# Altium PCB FMCWRadar.PcbDoc (part 4 of 5)
Units mil, origin at the board's own origin, x right, y up, seen from the top; angles counter-clockwise.
Board outline 4763.78 x 3464.57 mil, 6 copper layers (L1, L2(GND), L3, L4, L5(GND), L6), stack 32.112 mil thick; 306 components, 195 nets, 1057 pads, 1126 vias.
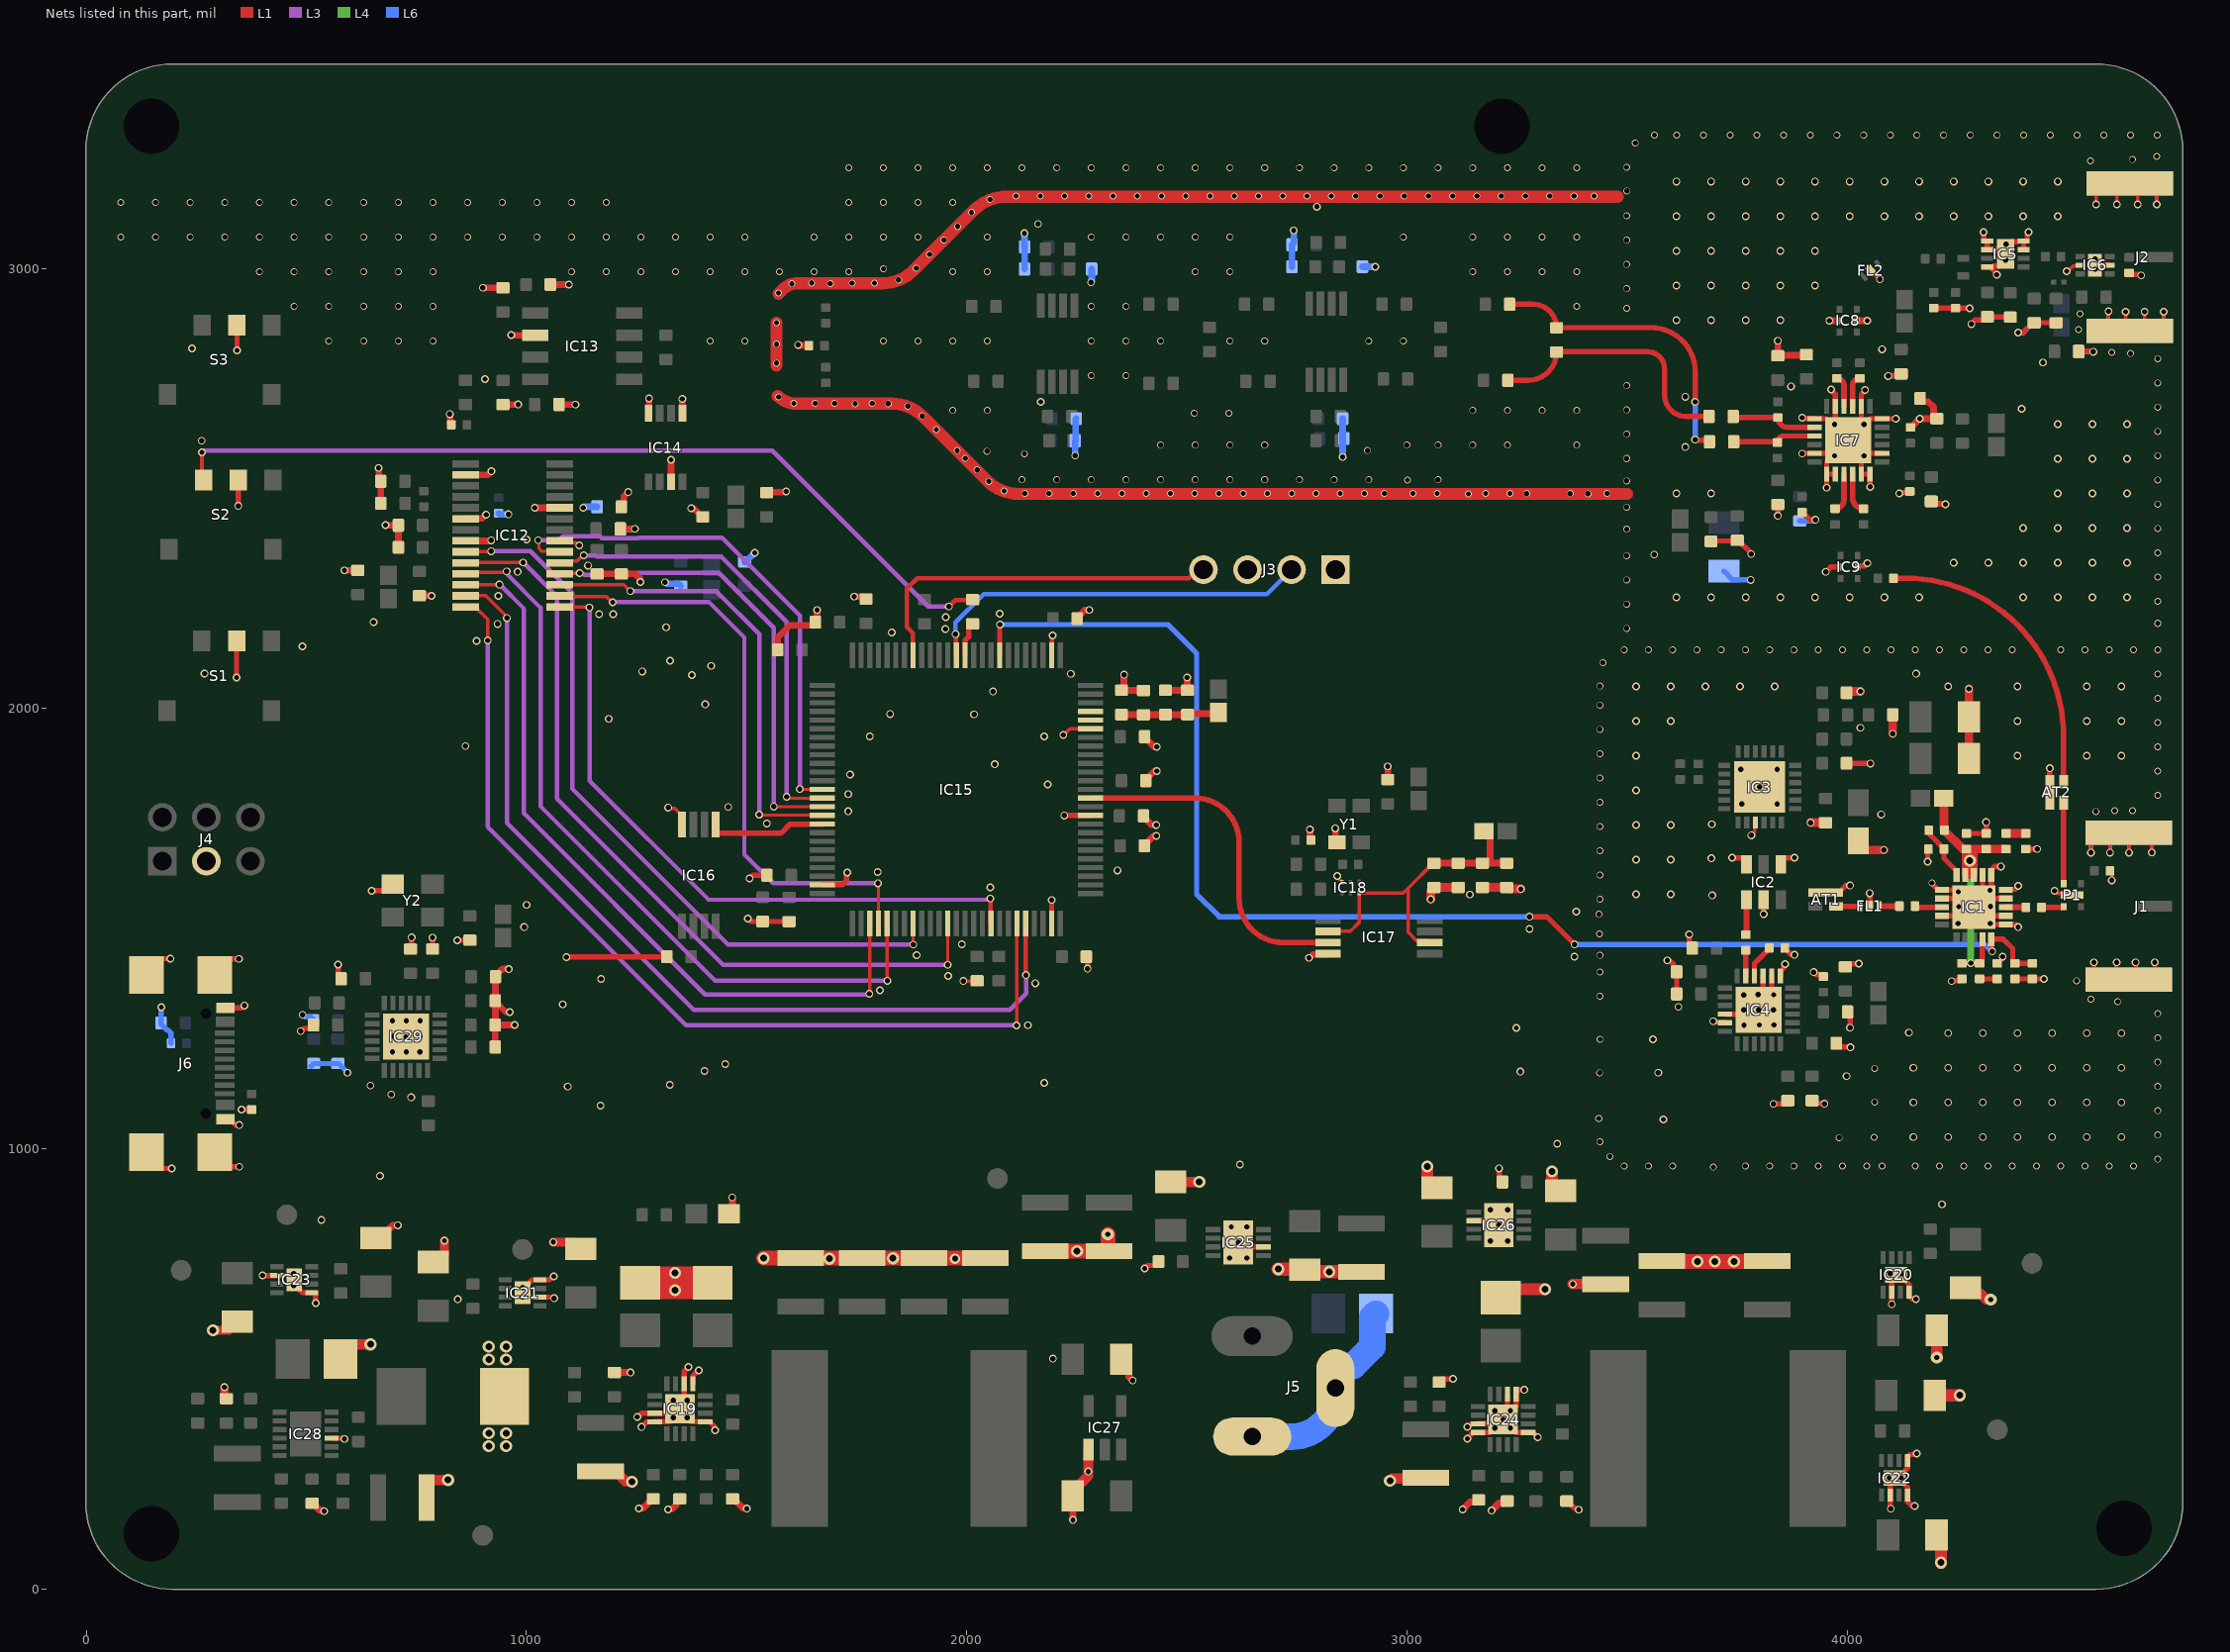
[diagram p7: the nets of this part, all layers, seen from the top]

## Via types
v1: diameter 17.72, hole 11.81, L1 to L6, tented both sides, 692 vias
v2: diameter 15.75, hole 11.81, L1 to L6, tented both sides, 386 vias
v3: diameter 27.56, hole 15.75, L1 to L6, tented both sides, 44 vias
v4: diameter 27.56, hole 11.81, L1 to L6, tented both sides, 3 vias
v5: diameter 23.62, hole 13.78, L1 to L6, tented both sides, 1 vias

## Nets (pads, with @x,y where several pads share a name; then routed paths per layer and width w, separated by ;. In a path a pad name is that pad's centre, name@x,y a point inside that pad or via, vN(x,y) a via of type N, cw(c..) or ccw(c..) an arc to the next point about the centre after c; other vN are vias at no path point) (continued)
BOOT1: R40.2 S2.C1 | length 1970.3
  L1 w10: v1(262.82,2582.15) 262.82,2523.1 S2.C1@266.75,2519.16 ; v1(1959.67,2231.76) 1960.13,2231.76 1974.8,2246.43 2012.82,2246.43 R40.2@2013.76,2247.37
  L3 w10: v1(262.82,2582.15) 266.62,2585.95 1558.23,2585.95 1912.42,2231.76 v1(1959.67,2231.76)
BOOT1_MCU: IC15.37 R40.1 | length 79.8
  L1 w12: IC15.37@1996.44,2120.73 1996.44,2154.92 2004.8,2163.28 2004.8,2185.25 2011.8,2192.25 R40.1@2013.76,2192.25
CLK_VDD: C114.1 C115.1 C116.2 C117.2 FB11.2 IC17.2 IC17.6 IC18.6 | length 750.3
  L1 w8: IC17.2@2821.09,1493.88 2871.45,1493.88 2891.44,1513.87 IC18.6@2891.44,1581.09 2992.24,1581.09 3003.04,1591.89 ; IC17.6@3052.42,1468.29 3047.57,1473.15 3021.59,1473.15 3003.04,1491.7 3003.04,1591.89 ; C117.2@3061.75,1648.65 3059.79,1648.65 3003.04,1591.89
  L1 w16: C117.2@3061.75,1648.65 C116.2@3116.75,1648.65 C115.1@3171.76,1648.65 3189.04,1648.65 ; FB11.2@3175.14,1721.09 3178.05,1721.09 3188.91,1710.22 3188.91,1648.77 3189.04,1648.65 ; C114.1@3224.79,1648.65 C114.1@3226.76,1648.65 3189.04,1648.65
DCMI-D0: IC12.20 IC15.63 | length 1188.4
  L1 w7: v1(1026.82,2382.38) 1028.8,2380.4 1028.8,2363.02 1035.02,2356.8 1074.63,2356.8 IC12.20@1075.3,2356.13 ; v1@1621.45,1816.49 IC15.63@1671.7,1816.49
  L1 w10: v1(1621.04,1816.9) v1@1621.45,1816.49 ; IC15.63@1671.7,1816.49 IC15.63@1672.11,1816.09
  L3 w10: v1(1026.82,2382.38) 1074.44,2382.38 1083.23,2391.17 1167.11,2391.17 1170.94,2387.34 1254.83,2387.34 1255.57,2388.08 1444.43,2388.08 1621.04,2211.47 v1(1621.04,1816.9)
DCMI-D1: IC12.19 IC15.64 | length 1065.2
  L1 w7: v1@1596.13,1796.15 IC15.64@1671.86,1796.15
  L1 w8: IC12.19@1075.56,2330.83 1080.12,2335.39 1115.02,2335.39 1127.6,2347.97 v1(1130.23,2347.97)
  L1 w10: v1(1591.04,1799.16) 1593.13,1799.16 v1@1596.13,1796.15 ; IC15.64@1671.86,1796.15 IC15.64@1672.11,1796.4
  L3 w10: v1(1130.23,2347.97) 1156.64,2347.97 1159.09,2345.52 1240.6,2345.52 1240.75,2345.36 1442.38,2345.36 1591.04,2196.7 v1(1591.04,1799.16)
DCMI-D2: IC12.18 IC15.65 | length 1058.6
  L1 w7: v1@1562.35,1777.03 IC15.65@1671.8,1777.03
  L1 w8: IC12.18@1075.3,2306.13 1075.97,2306.8 1120.37,2306.8 v1(1121.04,2307.47)
  L1 w10: v1(1562.04,1777.34) v1@1562.35,1777.03 ; IC15.65@1671.8,1777.03 IC15.65@1672.11,1776.72
  L3 w10: v1(1121.04,2307.47) 1122.51,2306 1129.58,2306 1131.55,2304.02 1246.24,2304.02 1250.44,2308.22 1437.29,2308.22 1562.04,2183.47 v1(1562.04,1777.34)
DCMI-D3: IC12.17 IC15.66 | length 1055.5
  L1 w7: v1@1533.5,1756.59 1533.5,1757.64 1533.95,1758.09 1671.05,1758.09 IC15.66@1672.11,1757.03
  L1 w8: IC12.17@1075.56,2280.83 1220.89,2280.83 1235.25,2266.47 v1(1236.04,2266.47)
  L1 w10: v1(1529,1759) 1531.09,1759 v1@1533.5,1756.59
  L3 w10: v1(1236.04,2266.47) 1239.35,2266.47 1239.6,2266.72 1304.81,2266.72 1305.4,2266.13 1431.38,2266.13 1529,2168.51 v1(1529,1759)
DCMI-D4: IC12.16 IC15.79 | length 1374.5
  L1 w7: IC15.79@1799.59,1511.44 v1@1799.59,1601.79
  L1 w8: IC12.16@1075.3,2256.13 1077.63,2253.79 1181.88,2253.79 1194.19,2241.47 v1(1196.04,2241.47)
  L1 w10: v1(1798.41,1602.97) v1@1799.59,1601.79
  L3 w10: v1(1196.04,2241.47) 1415.04,2241.47 1495.04,2161.47 1495.04,1668.47 1560.54,1602.97 v1(1798.41,1602.97)
DCMI-D5: IC12.15 IC15.92 | length 1543.3
  L1 w8: IC12.15@1075.3,2231.09 1076.11,2230.28 1142.23,2230.28 v1(1143.04,2229.47)
  L1 w10: v1(2054.04,1568.47) 2054.04,1544.61 2054.59,1544.06 2054.59,1512.35 IC15.92@2055.5,1511.44
  L3 w10: v1@1143.25,2229.26 1143.25,1836.12 1413.84,1565.53 2045.64,1565.53 2047.11,1567 2052.56,1567 v1(2054.04,1568.47)
DCMI-D6: IC12.14 IC15.95 | length 2153.1
  L1 w7: v1(2113.1,1280.2) 2113.83,1280.93 2113.83,1510.72 IC15.95@2114.55,1511.44
  L1 w8: IC12.14@861.76,2231.09 883.23,2231.09 912.04,2202.28 v1(912.04,2154.47)
  L3 w10: v1(912.04,2154.47) 912.04,1730.99 1362.49,1280.54 2112.76,1280.54 v1(2113.1,1280.2)
DCMI-D7: IC12.13 IC15.96 | length 2114.5
  L1 w7: IC15.96@2135.14,1483.41 2136.84,1481.71
  L1 w8: IC12.13@861.76,2256.13 907.82,2256.13 955.77,2208.18 v1(955.77,2205.58)
  L1 w10: IC15.96@2134.24,1511.44 2135.14,1510.54 IC15.96@2135.14,1483.41 ; IC15.96@2134.49,1483.41 2134.49,1394.57 v1(2134.7,1394.36)
  L3 w10: v1(955.77,2205.58) 955.77,1739.96 1380.34,1315.4 2097.97,1315.4 2134.97,1352.4 2134.97,1394.09 v1(2134.7,1394.36)
DCMI-D8: IC12.12 IC15.78 | length 1735.9
  L1 w7: v1(1778.98,1351.72) 1779.9,1352.64 IC15.78@1779.9,1511.44
  L1 w8: IC12.12@861.76,2281.09 861.86,2281.19 938.76,2281.19 v1(938.87,2281.3)
  L3 w10: v1(938.87,2281.3) 939.92,2281.3 994.57,2226.65 994.57,1761.69 1405.79,1350.47 1777.74,1350.47 v1(1778.98,1351.72)
DCMI-D9: IC12.11 IC15.80 | length 1742.9
  L1 w7: v1@1819.48,1381.76 IC15.80@1819.48,1511.24
  L1 w8: IC12.11@861.76,2306.13 865.24,2309.61 953.18,2309.61 v1(955.04,2311.47)
  L1 w10: IC15.80@1819.27,1511.44 IC15.80@1819.48,1511.24 ; v1@1819.48,1381.76 v1(1819.68,1381.55)
  L3 w10: v1(955.04,2311.47) 956.51,2310 956.51,2304.5 1032.04,2228.97 1032.04,1777.96 1428.52,1381.47 1819.6,1381.47 v1(1819.68,1381.55)
DCMI-D10: IC12.10 IC15.87 | length 1837.7
  L1 w7: v1@1957.05,1417.63 IC15.87@1957.05,1511.42
  L1 w8: IC12.10@861.76,2331.09 861.96,2331.29 992.02,2331.29 v1(992.48,2331.76)
  L3 w10: v1(992.48,2331.76) 992.75,2331.76 1069.04,2255.47 1069.04,1795.27 1446.84,1417.47 1956.89,1417.47 v1(1957.03,1417.61)
DCMI-D11: IC12.9 IC15.83 | length 1696.1
  L1 w7: IC15.83@1878.56,1511.22 1878.59,1511.18 1878.59,1464.13 v1(1878.86,1463.86)
  L1 w8: IC12.9@861.76,2356.13 862.43,2356.8 919.37,2356.8 v1(920.04,2357.47)
  L1 w10: IC15.83@1878.33,1511.44 IC15.83@1878.56,1511.22
  L3 w10: v1(920.04,2357.47) 1009.04,2357.47 1104.29,2262.22 1104.29,1817.55 1457.8,1464.04 1878.68,1464.04 v1(1878.86,1463.86)
FILT_IF_N: C55.1 R21.2 R22.2 | length 697.9
  L1 w12: R22.2@3233.6,2918.47 3286.6,2918.47 cw(c3286.6,2865.03) R21.2@3340.04,2865.03 3555.12,2865.03 cw(c3555.12,2765.03) 3655.12,2765.03 v1(3655.12,2696.39) ; v1(3655.12,2610.71) 3656.21,2609.61 3684.11,2609.61 C55.1@3687.64,2606.09
  L6 w12: v1(3655.12,2610.71) v1(3655.12,2696.39)
FILT_IF_P: C56.1 R17.2 R21.1 | length 610.7
  L1 w12: R17.2@3229.6,2745.47 3275.6,2745.47 ccw(c3275.6,2809.91) R21.1@3340.04,2809.91 3340.04,2810.5 3546.28,2810.5 cw(c3546.28,2771.13) 3585.65,2771.13 3585.65,2712.07 ccw(c3634.25,2712.07) 3634.25,2663.47 C56.1@3686.48,2663.47 C56.1@3679.48,2661.81
GND: AT1.G AT2.G C1.2 C2.1 C3.1 C5.2 C6.1 C7.1 C11.2 C13.2 C14.1 C15.1 C16.2 C17.1 C18.1 C20.1 C21.1 C22.1 C23.1 C24.1 C25.1 C26.1 C27.2 C28.1 C29.2 C30.1 C31.2 C32.1 C33.1 C34.2 C35.1 C36.1 C37.1 C40.1 C41.2 C42.1 C43.1 C44.1 C45.1 C46.1 C47.1 C48.1 C49.2 C50.2 C51.1 C52.1 C57.1 C58.1 C68.1 C69.1 C72.2 C73.2 C74.1 C75.1 C76.2 C77.2 C78.1 C79.1 C80.1 C81.1 C82.1 C83.1 C84.1 C85.1 C86.1 C87.1 C88.2 C89.1 C90.1 C91.1 C92.1 C93.1 C94.1 C95.1 C96.1 C97.1 C98.1 C99.1 C100.1 C101.1 C102.1 C103.1 C104.1 C105.1 C106.1 C107.1 C108.1 C109.1 C110.1 C111.1 C112.1 C113.1 C114.2 C115.2 C116.1 C117.1 C118.1 C119.1 C120.1 C121.2 C122.1 C123.1 C125.2 C126.2 C127.2 C129.1 C130.1 C131.1 C132.1 C134.1 C136.1 C137.1 C138.1 C139.2 C140.1 C142.1 C144.1 C145.1 C146.1 C147.2 C149.1 C150.1 C151.2 C152.1 C153.1 C154.1 C155.1 C156.1 C157.1 C158.1 C159.2 C160.1 C161.1 C162.1 C163.1 C164.1 C165.1 C166.1 C170.2 C171.1 C172.2 C173.1 C174.1 C175.1 C176.2 C177.1 C178.1 C179.1 C180.2 C181.1 FL1.2 FL2.2 IC1.1 IC1.2 IC1.4 IC1.11 IC1.12 IC1.14 IC1.15 IC1.16 IC1.17 IC1.21 IC2.1 IC2.3 IC2.5 IC3.15 IC3.25 IC4.1 IC4.2 IC4.3 IC4.10 IC4.11 IC4.25 IC5.3 IC5.4 IC5.5 IC5.6 IC5.8 IC5.9 IC6.2 IC6.5 IC6.7 IC7.1 IC7.2 IC7.5 IC7.6 IC7.8 IC7.12 IC7.14 IC7.17 IC7.19 IC7.23 IC7.25 IC8.2 IC8.5 IC9.2 IC9.5 IC12.2 IC12.6 IC12.8 IC12.21 IC12.24 IC13.6 IC14.1 IC14.4 IC14.7 IC15.10 IC15.20 IC15.27 IC15.74 IC15.99 IC16.4 IC17.4 IC18.3 IC19.3 IC19.4 IC19.9 IC19.13 IC19.14 IC19.17 IC20.2 IC20.4 IC20.9 IC21.2 IC21.4 IC21.9 IC22.2 IC22.4 IC22.5 IC22.9 IC23.2 IC23.5 IC23.9 IC24.3 IC24.4 IC24.9 IC24.13 IC24.14 IC24.17 IC25.6 IC25.9 IC26.6 IC26.9 IC27.1 IC28.9 IC29.25 J1.2 J1.3 J1.4 J1.5 J2.2 J2.3 J2.4 J2.5 J3.1 J3.3 J4.3 J5.2 J5.3 J6.A1 J6.B1 J6.S1 J6.S2 J6.S3 J6.S4 L5.2 LED1.1 P1.5 R2.1 R3.1 R4.1 R5.2 R8.2 R9.1 R29.1 R34.1 R36.1 R44.1 R45.1 R46.1 R49.1 R50.1 R51.1 R54.1 R56.1 R59.1 R60.1 R61.1 S1.B1 S2.B1 S3.B1 Y1.2 Y2.2 | length 21247.1
  L1 w8: IC12.21@1075.56,2380.83 1080.12,2376.26 1111.69,2376.26 1117.53,2370.42 v1(1120.16,2370.42) ; v1(1322.31,1775.06) 1324.17,1773.2 1337.1,1773.2 1353.37,1756.93 IC16.4@1353.37,1736.76 ; v1(1992.63,1380.79) 1992.92,1381.07 2023.76,1381.07 R36.1@2024.04,1381.35 ; v1(2219.51,1939.82) 2220.89,1939.82 2234.95,1953.88 IC15.20@2281.4,1953.88 ; v1(2841.91,1619.4) 2843.77,1617.54 2843.77,1614.85 2852.07,1606.55 IC18.3@2852.07,1604.71 ; IC4.10@3722.65,1305.69 IC4.10@3723.45,1306.49 ; v1(3782.5,1712.07) 3789.85,1719.42 3789.85,1739.18 IC3.15@3791.76,1741.09 IC3.15@3792.53,1740.31 ; v1(4471.48,1586.09) 4477.41,1580.16 4507.68,1580.16 P1.5@4511.76,1576.09 ; v1(4499.16,2993.16) 4501.78,2993.16 4513.8,3005.18 4527.85,3005.18 IC6.5@4529.76,3007.09 ; J1.3@4553.24,1738.24 4576.8,1714.68 4597.3,1714.68 J1.3@4600.66,1714.68 ; v1(4554.16,1672.7) J1.3@4554.16,1737.33 ; v1(4561.12,1423.26) 4561.12,1403.59 4584.68,1380.03 J1.2@4635.86,1380.03 ; v1(4565.97,3145.14) 4565.97,3166.62 J2.3@4589.53,3190.18 ; J2.3@4565.97,3213.74 J2.3@4589.53,3190.18 ; v1(4593.91,2902.15) 4593.91,2879.1 J2.2@4613.54,2859.47 ; J1.3@4596.55,1738.24 J1.3@4620.11,1714.68 ; R4.1@4597.19,1631.09 4601.4,1626.87 v1(4601.4,1609.71) ; J1.3@4597.3,1718.04 J1.3@4600.66,1714.68 ; v1(4597.46,1672.7) J1.3@4597.46,1737.33 ; J2.2@4597.46,2834.44 4621.02,2858 J2.2@4625.02,2858 ; J2.2@4598.53,2857.74 J2.2@4598.8,2858 ; J2.2@4598.8,2857.05 4641.32,2857.05 J2.2@4642.28,2858 ; v1(4612.3,1423.26) 4612.3,1403.59 J1.2@4635.86,1380.03 ; v1(4613.21,3145.14) 4613.21,3166.62 J2.3@4636.77,3190.18 ; J2.3@4617.15,3213.74 J2.3@4640.71,3190.18 ; J2.2@4625.02,2838.27 J2.2@4626.61,2838.27 ; v1(4632.9,2901.05) 4632.9,2879.1 J2.2@4652.52,2859.47 ; v1(4640.77,1672.7) 4640.77,1714 J1.3@4640.1,1714.68 ; J2.2@4642.29,2855.54 J2.2@4658.04,2855.54 ; J2.2@4642.29,2859.47 J2.2@4652.52,2859.47 ; J2.2@4649.44,2850.87 J2.2@4655.28,2856.71 ; J1.2@4655.61,1364.52 J1.2@4640.1,1380.03 ; v1@4655.61,1419.33 4655.61,1395.55 J1.2@4640.1,1380.03 ; v1(4660.46,3145.14) 4660.46,3170.43 J2.3@4640.71,3190.18 ; J2.3@4660.46,3208.35 J2.3@4642.29,3190.18 ; J2.2@4660.52,2855.54 4695.95,2855.54 4719.51,2879.1 v1(4719.51,2901.05) ; v1(4676.2,2901.05) 4676.2,2877.64 4658.04,2859.47 J2.2@4652.52,2859.47 ; J1.3@4691.92,1717.25 4670.05,1717.25 J1.3@4667.48,1714.68 ; v1(4692.42,1672.93) 4692.42,1715.87 4691.04,1717.25 4691.04,1738.24 J1.3@4667.48,1714.68 ; v1@4698.91,1419.33 4698.91,1403.59 4675.35,1380.03 J1.2@4640.1,1380.03 ; v1(4703.76,3145.14) 4703.76,3166.62 J2.3@4680.2,3190.18 ; J2.3@4703.76,3213.74 J2.3@4680.2,3190.18 ; J2.3@4589.53,3190.18 J2.3@4636.77,3190.18 ; J1.3@4600.66,1714.68 J1.3@4620.11,1714.68 ; J1.3@4620.11,1714.68 J1.3@4640.1,1714.68 ; J1.2@4635.86,1380.03 J1.2@4640.1,1380.03 ; J2.3@4636.77,3190.18 J2.3@4642.29,3190.18 ; J1.3@4640.1,1714.68 J1.3@4667.48,1714.68 ; J2.3@4640.71,3190.18 J2.3@4642.29,3190.18 ; J2.3@4642.29,3190.18 J2.3@4680.2,3190.18
  L1 w10: IC15.27@2193.61,2121.05 2194.2,2121.64 2194.2,2164.76 v1(2195.26,2165.82) ; v1(3695.95,1289.7) 3698.04,1289.7 3700.83,1286.91 3721.74,1286.91 IC4.11@3722.65,1286 ; IC4.10@3723.45,1306.49 IC4.10@3724.25,1305.69 ; IC4.25@3789.58,1305.69 v1(3799.42,1315.53)
  L1 w11.81: R50.1@3073.29,469.71 3080.39,476.8 3104.37,476.8 v1(3105.04,477.47) ; v1(3209.5,955.43) 3210.29,954.65 3210.29,931.5 C166.1@3217.38,924.41
  L1 w12: J6.S4@137.11,992.5 137.11,988.96 170.48,955.59 174.02,955.59 174.39,955.22 v1(194.26,955.22) ; J6.S3@137.11,1394.87 137.11,1398.29 170.48,1431.66 v1(191.28,1431.66) ; J6.S2@291.83,992.5 325.18,959.16 v1(347.8,959.16) ; J6.S1@291.83,1394.87 291.83,1397.83 325.2,1431.2 v1(346.86,1431.2) ; J6.B1@314.47,1067.7 325.29,1067.7 339.35,1053.64 v1(347.8,1053.64) ; J6.A1@314.47,1319.67 353.98,1319.67 v1(359.61,1325.3) ; v1(341.56,2070.34) S1.B1@341.56,2153.02 ; v1(342.62,2813.37) S3.B1@342.62,2870.89 ; v1(345.5,2460.1) S2.B1@345.5,2519.16 ; v1(352.85,1088.81) R61.1@375.47,1088.81 ; v1(400.48,712.02) 400.55,712.08 433.22,712.08 IC23.2@433.29,712.15 462.82,712.15 IC23.9@472.66,702.31 ; v1(471.48,688.45) 478.65,688.45 484.38,682.72 484.38,679.81 491.41,672.78 IC23.5@512.03,672.78 520.49,672.78 520.58,672.69 520.58,650.17 v1(521.68,649.08) ; v1@487.23,1267.29 488.88,1267.29 494.8,1273.21 509.76,1273.21 516.76,1280.21 C179.1@516.76,1281.09 ; R56.1@513.29,194.59 R56.1@515.25,194.59 ; v1@539.28,177.73 v1(540.38,176.64) ; IC28.9@557.35,342.31 557.44,342.21 583.58,342.21 584.99,340.81 v1(586.53,340.81) ; v1(572.2,1418.44) 572.2,1393.09 R59.1@579.2,1386.09 ; v1(648.64,1586.09) 681.2,1586.09 Y2.2@696.2,1601.09 ; C144.1@658.29,797.27 C144.1@668.13,797.27 ; C170.2@736.75,1453.65 739.2,1456.09 v1(739.2,1479.79) ; v1@786.44,1479.79 v1(786.76,1479.47) C171.1@786.76,1453.65 ; v1@841.56,1471.91 v1(843.17,1473.53) C181.1@871.75,1473.53 ; v1(1062.03,710.1) 1060.48,710.1 1052.61,702.23 IC21.4@1030.53,702.23 1030.44,702.13 1012.72,702.13 991.16,680.58 IC21.9@991.16,672.7 1001.01,662.86 IC21.2@1030.53,662.86 1058.83,662.86 1061.43,660.26 v1(1062.97,660.26) ; v1(1090.85,1435.09) 1091.35,1435.59 1318.69,1435.59 C119.1@1319.2,1436.09 ; v1(1251.81,390.79) 1253.36,390.79 1261.87,399.3 1291.58,399.3 IC19.3@1291.68,399.39 1338.92,399.39 ccw(c1338.92,409.24) IC19.17@1348.76,409.24 ; v1(1261.55,367.89) 1273.14,379.48 IC19.4@1290.64,379.48 ; IC19.4@1291.68,379.71 1319.24,379.71 ccw(c1319.24,409.24) IC19.17@1348.76,409.24 ; IC19.17@1349.73,409.24 1363.92,388.38 1368.42,381.77 ccw(c1379.26,409.24) 1379.26,379.71 IC19.9@1405.85,379.71 1416.49,379.71 1427.36,368.84 1427.36,361.35 v1(1428.45,360.26) ; v1(1368.13,504.39) 1358.61,494.87 IC19.14@1358.61,466.32 1358.61,419.08 cw(c1348.76,419.08) IC19.17@1348.76,409.24 ; IC19.13@1378.29,466.32 1378.29,484.14 v1@1390.73,496.58 ; v1(1502.98,1523.09) 1510.1,1515.97 C102.1@1596.76,1515.97 ; v1(1506.91,1613.65) 1514.35,1621.09 C118.1@1546.64,1621.09 ; IC15.74@1672.11,1599.55 1717.23,1599.55 1727.52,1609.85 1727.52,1626.05 v1(1728.62,1627.14) ; IC15.99@2193.29,1511.44 v1(2193.29,1565.06) ; v1(2221.79,1757.03) IC15.10@2281.4,1757.03 ; C103.1@2271.87,1436.09 2274.63,1433.33 v1(2274.63,1408.92) ; v1(2404.55,727.82) 2411.34,734.61 2429.05,734.61 2436.05,741.61 C158.1@2436.05,743.57 ; v1(2617.15,786.87) 2626.99,777.03 IC25.6@2674.24,777.03 ; v1(3137.79,341.47) 3137.79,342.28 3151.04,355.54 IC24.4@3161.68,355.54 3161.77,355.63 3189.33,355.63 IC24.17@3199.57,365.87 ; v1(3137.79,368.47) 3139.33,368.47 3145.99,375.13 3161.58,375.13 IC24.3@3161.68,375.22 IC24.17@3208.92,375.22 ; IC26.6@3151.76,836.65 3199,836.65 v1(3208.84,826.81) ; v1(3218.76,385.06) IC24.17@3228.61,394.91 ; IC24.14@3228.61,442.15 IC24.17@3228.61,394.91 ; IC24.17@3236.74,367.09 3248.2,355.63 3275.76,355.63 IC24.9@3275.85,355.54 3286.49,355.54 v1(3297.55,344.47) ; v1(3266.75,452.23) 3248.39,452.23 3248.29,452.13 IC24.13@3248.29,442.15 3248.2,442.06 3248.2,414.5 IC24.17@3228.61,394.91 ; R51.1@3363.29,199.59 3365.25,199.59 3381.96,182.88 3385.92,182.88 3388.86,179.94 v1(3390.41,179.94) ; v1(3591.8,1427.97) 3592.89,1426.88 3597.28,1426.88 3606.07,1418.08 3606.07,1408.69 C22.1@3613.07,1401.69 ; C23.1@3613.07,1351.69 C22.1@3613.07,1403.65 ; v1(3641.63,1486.8) 3641.63,1462.69 C21.1@3648.63,1455.69 ; C49.2@3690.76,2379.53 3692.03,2380.81 3749.48,2380.81 C50.2@3750.76,2382.09 3752.72,2382.09 3782.41,2352.39 v1(3782.41,2350.96) ; IC4.10@3724.25,1305.69 IC4.25@3789.58,1305.69 ; v1(3739.2,1660.89) 3765.75,1660.89 3771.76,1654.88 IC2.3@3771.76,1646.09 ; IC4.25@3809.26,1348.01 IC4.3@3809.26,1392.3 ; v1@3810.7,1532.85 IC2.5@3810.73,1565.38 ; IC4.25@3815.26,1348.01 3828.95,1361.7 IC4.2@3828.95,1392.3 ; v1(3832.9,1101.84) 3849.57,1101.84 3849.93,1102.19 3858.56,1102.19 C25.1@3865.56,1109.19 ; v1(3842.75,2437.68) C51.1@3842.75,2463.53 ; IC4.1@3848.63,1392.3 3848.63,1402.94 3858.34,1412.65 3858.34,1418.36 v1(3859.44,1419.45) ; IC2.1@3849.71,1646.09 3849.71,1654.88 3855.72,1660.89 v1(3880.93,1660.89) ; C13.2@3858.91,1455.69 3858.91,1454.7 3872.1,1441.51 3879.83,1441.51 v1(3880.93,1440.42) ; C44.1@3897.76,2445.65 3898.74,2445.65 3915.79,2428.61 v1(3928.17,2428.61) ; v1(3898.03,2579) 3898.72,2579.69 3926.05,2579.69 IC7.23@3926.14,2579.79 IC7.25@3973.39,2579.79 ; v1(3898.03,2660.59) 3899.58,2660.59 3901.55,2658.62 3926.05,2658.62 3926.24,2658.43 3953.79,2658.43 IC7.25@3969.28,2642.95 ; C26.1@3920.56,1109.19 3926.64,1103.12 3947.69,1103.12 v1(3948.79,1102.02) ; v1(3924.24,1401.05) 3930.32,1394.96 3942.35,1394.96 R8.2@3946.19,1391.12 ; AT1.G@3951.76,1581.84 3981.28,1581.84 3997.35,1597.9 v1(4006.91,1597.9) ; v1(3951.79,2310.5) 3962.79,2321.49 IC9.5@3985.06,2321.49 ; v1(3953.7,2501.38) IC7.1@3953.7,2532.54 ; v1(3963.8,2724.83) 3963.8,2723.28 3973.29,2713.79 3973.29,2686.18 IC7.17@3973.39,2686.09 IC7.25@3973.39,2645.14 ; IC7.25@3969.68,2576.08 3953.79,2560.2 3953.79,2532.64 IC7.1@3953.7,2532.54 ; IC7.2@3973.39,2532.54 IC7.1@3953.7,2532.54 ; C24.1@3975.42,1239.63 3975.42,1238.35 3982.42,1231.35 4006.55,1231.35 v1(4007.64,1230.26) ; C14.1@3996.19,1413.25 4003.19,1420.25 4026.11,1420.25 v1(4026.6,1420.73) ; C20.1@3998.75,1875.69 3999.01,1875.43 4053.02,1875.43 v1(4053.28,1875.17) ; C15.1@4001.31,1310.69 4006.91,1305.09 v1(4006.91,1275.06) ; IC7.25@4002.91,2609.32 4032.44,2638.84 IC7.14@4032.44,2686.09 4032.53,2686.18 4032.53,2713.8 4040.88,2722.14 v1(4040.88,2723.69) ; IC9.2@4024.04,2321.49 4024.04,2323.06 4024.53,2323.56 4039.66,2323.56 v1(4046.28,2330.18) ; IC7.25@4032.44,2574.28 IC7.5@4032.44,2532.54 IC7.6@4052.13,2532.54 4052.22,2532.45 4052.22,2503.84 v1(4052.54,2503.52) ; IC7.25@4038.41,2579.79 IC7.8@4079.68,2579.79 ; IC7.25@4038.57,2644.98 4052.03,2658.43 4079.59,2658.43 IC7.12@4079.68,2658.53 v1(4110.85,2658.53) ; FL1.2@4051.76,1551.09 v1(4051.76,1580.61) ; FL2.2@4054.16,2995.54 v1(4074.72,2974.98) ; v1(4093.53,2755.38) 4094.62,2756.47 4118.7,2756.47 C32.1@4122.75,2760.53 ; v1(4099.32,182.2) 4098.54,182.98 4098.54,212.69 IC22.2@4098.45,212.78 4098.45,242.31 IC22.9@4108.29,252.15 4116.16,252.15 4137.72,273.71 4137.72,291.43 IC22.5@4137.82,291.52 4137.82,300.19 4142.91,305.28 4151.58,305.28 4152.94,306.65 4157.39,306.65 v1(4158.49,307.74) ; v1(4101.64,646.4) IC20.2@4101.63,674.04 4101.63,703.57 IC20.9@4111.47,713.41 4119.35,713.41 4140.9,691.85 4140.9,674.13 IC20.4@4141,674.04 4141,665.37 4148.2,658.17 v1(4156.67,658.17) ; v1(4118.71,2488.83) 4119.81,2489.92 4139.59,2489.92 C45.1@4142.76,2493.09 ; IC22.9@4119.37,248.94 4137.72,230.59 4137.72,212.87 IC22.4@4137.82,212.78 4137.82,198.05 4146.61,189.26 4152.35,189.26 v1(4153.44,188.17) ; v1(4182.97,1651.91) 4182.97,1678.96 C6.1@4184.74,1680.73 ; C43.1@4191.75,2470.53 4198.24,2464.04 v1(4223.45,2464.04) ; v2(4192.91,1603.54) 4193.62,1602.82 4193.62,1601.14 4206.63,1588.13 IC1.1@4215.49,1588.13 4248.57,1588.13 v1(4252.86,1583.84) ; C35.1@4196.76,2909.37 4278.12,2909.37 v1(4278.57,2908.92) ; IC1.4@4215.49,1529.08 4268.64,1529.08 IC1.21@4288.32,1548.76 4268.64,1568.45 IC1.2@4215.49,1568.45 ; v1(4237.62,1380.55) 4239.16,1380.55 4240.51,1381.89 4257.31,1381.89 C1.2@4261.16,1385.73 ; C7.1@4271.16,1716.17 C5.2@4316.16,1716.17 v1(4316.16,1741.79) ; v1(4282.5,2873.49) 4291.93,2882.91 4312.04,2882.91 C34.2@4319.04,2889.91 4319.54,2889.41 4370.54,2889.41 C33.1@4371.04,2888.91 ; IC1.21@4308.01,1529.08 IC1.12@4361.16,1529.08 ; IC1.21@4308.01,1568.45 IC1.17@4308.01,1621.6 ; v1(4310.06,3082.15) 4310.92,3081.29 4310.92,3062.1 4311.01,3062 IC5.5@4318.7,3062 ; IC1.21@4317.85,1578.29 4327.69,1568.45 IC1.14@4361.16,1568.45 ; IC5.5@4318.7,3061.91 IC5.6@4318.7,3042.32 4350.2,3042.32 IC5.9@4360.04,3032.47 ; v1(4324.83,1587.1) 4327.69,1589.96 IC1.16@4327.69,1621.6 4328.58,1622.49 4328.58,1634.18 4335.61,1641.21 v1(4349.43,1641.21) ; v1(4325.22,1511.62) 4327.44,1509.39 IC1.11@4361.16,1509.39 4362.05,1508.5 4383.71,1508.5 v1(4388.8,1503.41) ; v1(4340.11,2985.44) 4340.11,2986.99 4326.48,3000.62 4326.48,3002.85 4326.38,3002.95 IC5.8@4318.7,3002.95 4318.79,3003.04 4330.61,3003.04 4332.57,3005.01 4346.35,3005.01 v1(4360.04,3018.69) IC5.9@4360.04,3032.47 ; R2.1@4341.16,1421.17 4342.14,1421.17 4352.28,1431.3 4352.28,1435.39 v1(4353.37,1436.48) ; IC1.15@4361.16,1588.13 4362.05,1589.02 4381.77,1589.02 4388.8,1596.05 v1@4388.8,1597.9 ; R5.2@4381.16,1385.73 C11.2@4421.16,1385.73 v1(4447.42,1385.73) ; v1(4388.8,2853.8) 4400.53,2853.8 4423.08,2876.35 C30.1@4425.04,2876.35 C37.1@4475.04,2876.35 ; IC5.3@4401.38,3042.32 IC5.4@4401.38,3062 ; R3.1@4406.16,1680.73 v1(4431.95,1680.73) v1@4432.11,1680.58 ; v1(4412.42,3082.15) 4412.42,3080.6 4409.16,3077.34 4409.16,3062.1 4409.06,3062 IC5.4@4401.38,3062 ; AT2.G@4460.54,1809.85 v1(4460.57,1864.25) ; C28.1@4526.16,2811.47 v1@4559.07,2811.47 ; IC6.7@4563.22,3007.09 IC6.2@4596.68,3007.09 IC6.2@4596.78,3006.99 ; C40.1@4640.77,2989.63 4644.61,2985.79 4664.72,2985.79 4666.78,2983.72 v1(4668.33,2983.72) ; IC5.9@4360.04,3032.47 4360.04,3046.25 4373.72,3059.94 4387.5,3059.94 4389.47,3061.91 4401.28,3061.91 IC5.4@4401.38,3062
  L1 w15: v1(586.44,2313.65) C97.1@616.76,2313.65 ; v1(663.94,2546.59) 664.46,2546.07 664.46,2520.82 C93.1@669.2,2516.09 C94.1@669.2,2466.09 ; v1(680.14,2416.8) 680.85,2416.09 C82.1@709.2,2416.09 C80.1@709.2,2366.09 ; C98.1@756.76,2256.09 v1(784.38,2256.09) ; v1(825.81,2668.76) 825.81,2668.03 826.98,2666.86 826.98,2646.82 C88.2@829.32,2644.47 ; IC12.8@862.02,2380.83 918.02,2380.83 919.31,2382.12 v1(920.05,2382.12) ; IC12.6@862.02,2430.83 863.08,2431.89 899.22,2431.89 907.75,2440.42 v1(908.49,2440.42) ; IC12.2@862.02,2530.83 912.28,2530.83 v1(920.3,2538.84) ; v1(901.13,2955.65) C92.1@946.76,2955.65 ; C177.1@929.31,1231.09 C175.1@929.31,1281.09 ; C174.1@929.31,1336.09 929.31,1334.13 952.42,1311.02 961.59,1311.02 v1(962.11,1310.5) ; C174.1@929.46,1328.63 929.46,1281.09 v1(973.33,1281.09) ; C174.1@929.46,1336.09 929.46,1390.33 C176.2@929.6,1390.47 929.6,1392.43 945.57,1408.4 958.39,1408.4 958.93,1407.86 v1(959.67,1407.86) ; C86.1@946.75,2690.53 v1(981.43,2690.53) ; v1(965.76,2848.09) IC13.6@1019.98,2848.09 ; v1(1019.02,2455.87) IC12.24@1075.56,2455.87 ; C91.1@1054.31,2963.09 v1(1096.51,2963.09) ; C87.1@1074.16,2690.47 v1(1111.3,2690.47) ; C84.1@1160.75,2305.53 1247.98,2305.53 1258.02,2295.5 1258.02,2289.23 1259.04,2288.21 v1(1259.04,2287.47) ; C83.1@1213.31,2408.09 v1(1246.24,2408.09) ; C95.1@1215.87,2458.09 1221.37,2463.59 1221.37,2481.65 v1(1231.32,2491.6) ; IC14.4@1277.37,2670.84 1278.57,2672.04 v1(1278.57,2704.2) ; IC14.7@1328.55,2515.33 v1(1328.55,2565.21) ; IC14.1@1354.14,2670.84 v1(1354.14,2703.43) ; v1(1374.34,2454.88) 1374.86,2454.36 1379.96,2454.36 1398.79,2435.53 C89.1@1400.75,2435.53 ; C90.1@1545.76,2490.65 1546.71,2491.6 1587.54,2491.6 1589.18,2493.24 v1(1589.92,2493.24) ; C112.1@1570.92,2133.47 1570.92,2161.69 1597.85,2188.63 1651.14,2188.63 1656.64,2194.13 C107.1@1656.64,2196.09 1660.46,2199.91 v1(1660.46,2223.88) ; v1@1617.04,2824.78 1641.22,2824.78 R29.1@1641.53,2824.47 ; v1(1744.36,2254.15) 1766.25,2254.15 C121.2@1771.75,2248.65 ; C105.1@2251.01,2204.2 2251.01,2206.16 2268.21,2223.36 2278.05,2223.36 v1(2278.57,2223.88) ; C108.1@2351.76,2041.21 2351.81,2041.21 2357.31,2046.71 2357.31,2076.23 v1(2357.83,2076.75) ; C108.1@2357.31,2041.05 2401.52,2041.05 C109.1@2401.68,2040.89 ; C104.1@2401.87,1756.09 2401.87,1754.13 2420.28,1735.72 2430.26,1735.72 v1(2430.78,1735.2) ; C101.1@2404.31,1688.16 2404.31,1690.12 2424.5,1710.3 2430.47,1710.3 v1(2430.99,1710.82) ; C106.1@2404.31,1936.09 2404.31,1934.13 2425.58,1912.86 v1(2432.11,1912.86) ; C120.1@2406.87,1836.09 2406.87,1838.05 2426.57,1857.74 v1(2432.11,1857.74) ; C110.1@2451.76,2041.21 C111.1@2501.76,2041.21 2501.33,2041.63 2501.33,2069.92 v1(2500.91,2070.34) ; v1(2777.82,1433.54) 2778.56,1433.54 2786.36,1441.34 2819.73,1441.34 IC17.4@2821.09,1442.7 ; v1(2779.71,1725.31) 2780.23,1724.79 2780.23,1703.05 C122.1@2782.19,1701.09 ; v1(2837.62,1727.82) 2837.62,1700.1 Y1.2@2841.64,1696.09 ; C123.1@2956.76,1838.65 v1(2956.76,1868.53) ; v1(3842.76,2835.32) C52.1@3842.76,2801.21 3843.98,2802.43 3906.53,2802.43 C47.1@3907.76,2803.65 ; v1(3959.94,2881.09) IC8.2@3983.27,2881.09 ; IC8.5@4022.24,2881.09 v1(4046.01,2881.09) ; C57.1@4144.04,2638.47 4145.02,2638.47 v1(4164.87,2658.32) C58.1@4204.04,2658.32 4202.08,2658.32 4196.58,2663.82 4196.58,2684.99 4184.55,2697.01 4171.66,2697.01 4166.16,2702.51 C46.1@4166.16,2704.47
  L1 w15.75: R56.1@522.04,187.47 531.78,177.73 v1@539.28,177.73 ; R45.1@1199.83,491.6 v1(1236.24,491.6) ; v1(1255.52,182.61) 1256.62,183.7 1265.44,183.7 1286.33,204.59 C139.2@1288.29,204.59 ; v1(1321.87,180.58) 1322.41,180.58 1323.5,181.67 1330.51,181.67 1341.2,192.36 1341.2,199.47 1346.33,204.59 R44.1@1348.29,204.59 ; LED1.1@1460.38,852.15 1467.54,859.32 v1(1467.54,889.24) ; R46.1@1468.29,204.59 1470.25,204.59 1491.39,183.45 1499.28,183.45 v1(1500.38,182.35) ; C164.1@2241.12,211.91 2241.38,211.65 v1(2241.38,156.56) ; C165.1@2351.36,521.91 2369.08,504.2 2369.08,481.97 2377.04,474.01 v1(2377.04,473.47)
  L1 w15.94: C144.1@668.13,797.27 697.11,826.24 v1(707.7,826.24)
  L1 w16: v1(3126.91,180.74) 3143.21,197.03 3158.29,197.03 C151.2@3163.29,202.03 ; v1(3192.38,177.85) 3209.12,194.59 3223.29,194.59 R49.1@3228.29,199.59
  L1 w20: v3(287.91,587.56) 323.7,587.56 C146.1@343.29,607.15 ; v1(314.1,457.96) 314.1,435.15 317.1,432.15 R54.1@318.29,432.15 ; C136.1@788.29,742.39 798.13,742.39 813.72,757.98 813.72,790.54 v1(814,790.81) ; v1(1060.93,787.98) 1107.7,787.98 C138.1@1123.29,772.39 ; v1(3054.16,1566.4) 3054.16,1585.93 3056.79,1588.57 3056.79,1590.53 3059.79,1593.53 C117.1@3061.75,1593.53 C116.1@3116.75,1593.53 ; C115.2@3171.76,1593.53 C114.2@3226.76,1593.53 3229.76,1590.53 3258.38,1590.53 v1(3258.88,1590.02) ; v1(3917.3,1740.57) C17.1@3951.19,1740.57 ; R9.1@3998.75,2035.69 3998.75,2035.84 4001.75,2038.84 v1(4030.53,2038.84) ; C16.2@4026.19,1699.07 4026.19,1692.18 4039.82,1678.56 v1(4083.73,1678.56) ; v1(4103.75,1942.77) C18.1@4103.75,1985.69 ; C3.1@4276.99,1886.09 C2.1@4276.99,1981.09 v1(4276.99,2044.35)
  L1 w23: C164.1@2241.12,211.91 2241.12,221.76 2276.1,256.73 v1(2276.1,266.66) ; v1@2276.56,266.66 IC27.1@2276.56,316.91
  L1 w23.62: C159.2@577.42,522.15 577.42,529.04 604,555.61 v3(645.73,555.61) ; C160.1@773.29,207.15 773.29,241.32 779.48,247.5 v3(821.87,247.5) ; C140.1@1168.29,267.15 1203.29,267.15 1226.21,244.23 1239.29,244.23 v3(1240.04,243.47) ; C155.1@2463.61,924.67 v3(2528.57,924.67) ; v3(2961.64,245.54) 2966.98,250.88 C152.1@3042.02,250.88 ; v1(3376.99,692.39) C163.1@3451.79,692.39 3486.71,692.39 C163.1@3492.9,686.2 ; C134.1@4269.04,684.35 4282.82,670.58 4303.82,670.58 4316.2,658.2 4325.87,658.2 v4(4326.62,657.45)
  L1 w25.43: v4(4204.04,525.47) C137.1@4204.04,587.35
  L1 w27.56: v2@1567.85,2778.98 v2(1567.85,2876.42) ; v2@1570.81,2710.08 1571.12,2709.76 ccw(c1613.13,2751.77) 1613.13,2692.36 1830.57,2692.36 cw(c1830.57,2592.36) 1901.28,2663.07 2047.42,2516.93 ccw(c2118.13,2587.64) 2118.13,2487.64 3500.92,2487.64 ; v2@1572.77,2942.36 1581.78,2951.37 cw(c1617.07,2916.08) 1617.07,2965.98 1808.91,2965.98 ccw(c1808.91,3065.98) 1879.62,2995.27 2014.94,3130.59 cw(c2092.78,3052.75) 2092.78,3162.83 3478.48,3162.83 ; v3(3046.5,959.43) 3046.5,933.35 3046.65,933.21 3046.65,923.36 3058.46,911.55 C161.1@3068.3,911.55 ; C147.2@3213.29,661.28 3232.58,680.58 v3(3314,680.58) ; v3(3329.9,948.29) 3329.9,916.06 3341.72,904.25 C162.1@3349.59,904.25 ; C142.1@4199.27,439.47 4255.97,439.47 v3(4256.4,439.91) ; C145.1@4203.53,122.15 4213.61,112.07 v3(4213.61,59.71)
  L1 w30.43: v3(2708.04,726.47) 2762.04,726.47 2768.04,720.47 v3(2824.04,720.47) 2824.16,720.35 C153.1@2896.39,720.35
  L1 w33.46: v3(1538.64,751.21) C129.1@1622.82,751.21 ; C129.1@1622.58,751.44 C129.1@1622.82,751.21 ; C131.1@2042.82,751.21 C130.1@1902.82,751.21 v3(1832.82,751.21) C132.1@1762.82,751.21 C129.1@1622.82,751.21 ; C157.1@2178.29,767.15 v3(2250.79,767.15) C156.1@2322.31,767.15 ; v4(2321.04,805.47) 2321.04,768.42 C156.1@2322.31,767.15 ; C156.1@2326.04,768.42 2324.77,767.15 C156.1@2323.29,767.15 C156.1@2322.31,767.15 ; C152.1@3042.02,250.88 C152.1@3043.29,252.15 ; C149.1@3550.22,745.74 3551.49,744.47 C149.1@3579.04,744.47 3579.94,743.57 v3(3660.46,743.57) v3(3699.83,743.57) v3(3743.13,743.57) 3818.13,743.57 C150.1@3819.04,744.47
  L1 w35.43: C153.1@2896.39,720.35 C153.1@2896.68,720.06 ; C137.1@4196.28,579.6 4204.04,587.35 C137.1@4204.16,587.47 ; C142.1@4199.27,439.47 C142.1@4201.72,441.91
  L1 w39.37: C142.1@4201.72,441.91 C142.1@4205.04,445.24
  L1 w60: J5.3@2837.62,445.93 J5.3@2837.62,456.17
  L1 w75: C126.2@1258.29,695.42 C127.2@1423.29,695.42
  L6 w8: v1(4554.16,1672.7) 4554.16,1694.7 4577.72,1718.26 J1.5@4620.11,1718.26 ; J1.4@4557.18,1360.05 J1.4@4580.74,1383.61 ; v1(4561.12,1423.26) 4561.12,1407.17 4584.68,1383.61 J1.4@4635.86,1383.61 ; v1(4593.91,2902.15) 4593.91,2881.56 4617.47,2858 J2.4@4642.28,2858 4652.64,2858 J2.4@4676.2,2834.44 ; v1(4597.46,1672.7) 4597.46,1695.61 J1.5@4620.11,1718.26 ; J1.4@4612.3,1360.05 J1.4@4635.86,1383.61 ; v1(4612.3,1423.26) 4612.3,1407.17 J1.4@4635.86,1383.61 ; J1.4@4636.25,1379.96 J1.4@4639.9,1383.61 ; v1(4640.77,1672.7) 4640.77,1717.38 J1.5@4639.9,1718.26 ; J2.5@4642.28,3192.65 4680.2,3192.65 4703.76,3169.09 v1(4703.76,3145.14) ; J1.4@4655.61,1367.9 J1.4@4639.9,1383.61 ; v1(4655.61,1423.26) 4655.61,1399.32 J1.4@4639.9,1383.61 ; v1(4692.42,1672.93) 4692.42,1694.7 4668.86,1718.26 J1.5@4639.9,1718.26 ; J1.4@4698.91,1360.05 J1.4@4675.35,1383.61 ; v1(4698.91,1423.26) 4698.91,1407.17 J1.4@4675.35,1383.61 ; J2.4@4719.51,2834.44 4695.95,2858 4719.51,2881.56 v1(4719.51,2901.05) ; J1.5@4620.11,1718.26 J1.5@4639.9,1718.26 ; J1.4@4635.86,1383.61 J1.4@4639.9,1383.61 ; J1.4@4639.9,1383.61 J1.4@4675.35,1383.61
  L6 w12: C180.2@170.63,1286.25 C180.2@169.91,1285.53 ; v1(170.63,1321.36) 169.91,1320.64 C180.2@169.91,1285.53 ; R60.1@192.47,1239.53 192.47,1262.97 185.44,1270 183.48,1270 169.91,1283.57 C180.2@169.91,1285.53 ; v1(491.63,1304.21) 493.18,1304.21 497.34,1300.05 509.64,1300.05 516.64,1293.05 C178.1@516.64,1291.09 ; C173.1@510.85,1187.62 C173.1@516.76,1193.53 C172.2@571.75,1193.53 573.72,1193.53 593.53,1173.72 v1(593.53,1172.7) ; C48.1@3720.76,2311.85 3740.35,2292.26 v1(3781.05,2292.26) ; C42.1@3892.76,2426.09 3924.11,2426.09 3926.63,2428.61 v1(3928.17,2428.61) ; v1(4093.53,2755.38) 4117.61,2755.38 C31.2@4122.75,2760.53 ; C41.2@4191.75,2470.53 4197.15,2465.13 4222.35,2465.13 v1(4223.45,2464.04) ; v1(4388.8,2853.8) 4389.9,2854.9 4401.62,2854.9 4423.08,2876.35 C29.2@4425.04,2876.35 ; C27.2@4526.51,2810.49 v1(4559.43,2810.49)
  L6 w15: R34.1@936.76,2443.37 939.1,2441.03 v1(959.06,2441.03) ; v1(1128.96,2456.17) 1129.69,2456.17 1131.62,2458.09 C96.1@1160.76,2458.09 ; C81.1@1213.31,2408.09 v1(1246.24,2408.09) ; v1(1314.73,2286.87) 1318.14,2283.47 1345.26,2283.47 C100.1@1350.76,2277.97 ; C99.1@1495.76,2333.21 1497.72,2333.21 1518.31,2353.8 v1(1518.72,2353.8) ; v1(2131.52,3079.59) C73.2@2131.52,3048.53 2131.58,3048.47 2131.58,2998.59 C74.1@2131.64,2998.53 ; v1@2247.07,2574.28 v1(2246.64,2574.71) C76.2@2246.64,2608.53 2247.92,2609.81 2247.92,2657.25 C78.1@2249.2,2658.53 ; v1(2282.5,2967.98) 2284.2,2969.67 C69.1@2284.2,2998.53 ; C75.1@2739.08,3003.53 C72.2@2739.08,3053.53 2743.13,3057.58 v1(2743.13,3086.09) ; v1(2854.2,2571.17) C79.1@2854.2,2658.53 ; C68.1@2899.2,3003.53 v1(2928.29,3003.53)
  L6 w60: J5.2@2648.64,345.93 2737.62,345.93 ccw(c2737.62,445.93) J5.3@2837.35,438.54 ; J5.3@2837.62,456.17 2837.62,494.24 2849.92,506.53 2878.29,506.53 2921.65,549.9 2921.65,617.09 C125.2@2930.04,625.47
  other v1: 4095.5,252.62 4123.05,252.62 3199.83,365.61 3235.26,365.61 1333.68,389.24 1365.18,389.24 3199.83,404.98 3235.26,404.98 1333.68,428.61 1365.18,428.61 1391.65,496.58 2195.89,523.1 843.89,657.97 991.16,662.72 991.16,684.51 4125.14,715.82 471.48,716.01 4098.04,716.47 2597.46,751.44 2636.83,751.44 3189.83,790.55 3229.2,790.55 2601.4,822.31 2636.83,822.31 534.47,838.06 3189.83,861.42 3229.2,861.42 4215.57,873.49 667.22,938.3 2621.09,964.04 3341.56,1011.28 4150.91,1026.5 4229.65,1026.5 4308.39,1026.5 4387.13,1026.5 4465.87,1026.5 4544.61,1026.5 4623.35,1026.5 3582.71,1066.23 1168.33,1097.9 4150.91,1105.24 4229.65,1105.24 4308.39,1105.24 4387.13,1105.24 4465.87,1105.24 4544.61,1105.24 4623.35,1105.24 738.08,1116.59 692.91,1123.09 1094.05,1141.08 645.62,1143.53 1325.81,1145.14 2176.2,1149.74 3999.04,1164.83 3571.19,1172.69 3258.02,1175.05 1404.55,1176.64 4150.91,1183.98 4229.65,1183.98 4308.39,1183.98 4387.13,1183.98 4465.87,1183.98 4544.61,1183.98 4623.35,1183.98 1451.79,1192.39 695.89,1219.95 727.38,1219.95 757.82,1219.95 3559.38,1248.76 726.28,1254.32 695.89,1255.38 757.82,1255.38 4229.65,1262.72 4308.39,1262.72 4387.13,1262.72 4465.87,1262.72 4544.61,1262.72 4623.35,1262.72 4140.66,1263.69 487.23,1267.19 3249.04,1274.47 2139.04,1280.47 3765.73,1280.77 3800.63,1280.9 3833.85,1280.9 695.89,1290.81 727.38,1290.81 758.88,1290.81 3765.22,1315.41 3832.82,1315.67 3617.15,1322.31 1082.66,1327.85 3765.6,1349.4 3833.68,1349.87 3797.83,1350.07 1802.95,1359.72 2156.14,1375.91 1169.64,1385.71 1958.04,1392.47 3380.93,1436.48 1886.68,1439.68 1989,1464.63 3278.57,1499.47 995.1,1503.41 4252.08,1511.88 3810.68,1532.83 3384.87,1538.84 4253.99,1549.97 4325.81,1550.65 1000.62,1553.81 3693.73,1575.3 3143.39,1577.51 3520.99,1577.68 3599.73,1577.68 2054.04,1593.47 4388.8,1596.98 1798.04,1628.47 2342.67,1632.29 3520.99,1656.42 3599.73,1656.42 3691.79,1659.61 3520.99,1735.16 3599.73,1735.16 3692.76,1737.13 1546.2,1738.7 4077.78,1759.32 1731.04,1766.47 1458.47,1776.37 3841.56,1782.94 3760.73,1783.28 1731.04,1805.47 3520.99,1813.9 3801.6,1821.8 2184.32,1827.48 1735.26,1849.87 3758.88,1861.68 3841.56,1861.68 2064.02,1873.26 3520.99,1892.65 4387.13,1892.65 4544.61,1892.65 4623.35,1892.65 861.46,1914.72 1780.04,1936.47 2176.2,1936.48 4030.53,1956.17 3520.99,1971.39 3599.73,1971.39 4387.13,1971.39 4544.61,1971.39 4623.35,1971.39 1187.23,1976.39 2017.04,1986.47 1826.04,1987.47 1406.47,2009.27 2060.04,2038.47 3520.99,2050.13 3599.73,2050.13 3678.47,2050.13 3757.21,2050.13 3835.95,2050.13 4229.65,2050.13 4387.13,2050.13 4544.61,2050.13 4623.35,2050.13 1375.68,2075.94 2236.7,2078.71 268.88,2079.18 4156.83,2079.01 1263.1,2084.22 1419.9,2096.84 1326.48,2108.56 491.16,2141.21 887.04,2153.47 1829.75,2172.7 1951.79,2180.58 1317.18,2184.5 934.51,2192.17 652.58,2196.32 1952.72,2207.54 1165.04,2214.47 1197.04,2214.47 2075.11,2215.44 3612.43,2252.27 3691.17,2252.27 3769.91,2252.27 3848.65,2252.27 3927.39,2252.27 4006.13,2252.27 4084.87,2252.27 4163.61,2252.27 4399.84,2252.27 4478.58,2252.27 4557.32,2252.27 4636.06,2252.27 936.22,2255.66 979.93,2310.6 1140.15,2324.77 4242.36,2331.01 4321.1,2331.01 4399.84,2331.01 4478.58,2331.01 4557.32,2331.01 4636.06,2331.01 3562.03,2349.87 1000.33,2383.97 4399.84,2409.75 4478.58,2409.75 4557.32,2409.75 4636.06,2409.75 3612.43,2488.49 3691.17,2488.49 4478.58,2488.49 4557.32,2488.49 4636.06,2488.49 4478.58,2567.23 4557.32,2567.23 4636.06,2567.23 3971.48,2574.28 4038.41,2574.28 3632.9,2593.96 262.32,2608.19 3971.48,2645.14 4038.41,2645.14 4478.58,2645.97 4557.32,2645.97 4636.06,2645.97 4396.68,2680.58 2168.33,2696.32 3632.9,2708.13 3873.05,2731.76 905.95,2748.17 4445.08,2785.85 4079.42,2816.07 240.54,2818.1 1617.15,2826.24 3612.43,2882.19 3691.17,2882.19 3769.91,2882.19 3848.65,2882.19 3612.43,2960.93 3691.17,2960.93 3769.91,2960.93 3848.65,2960.93 3927.39,2960.93 4563.56,2997.89 4563.56,3020.94 3612.43,3039.67 3691.17,3039.67 3769.91,3039.67 3848.65,3039.67 3927.39,3039.67 4361.24,3054.59 2162.38,3100.61 3612.43,3118.41 3691.17,3118.41 3769.91,3118.41 3848.65,3118.41 3927.39,3118.41 4006.13,3118.41 4084.87,3118.41 4163.61,3118.41 4242.36,3118.41 4321.1,3118.41 4399.84,3118.41 4478.58,3118.41 2795.87,3139.95 3612.43,3197.15 3691.17,3197.15 3769.91,3197.15 3848.65,3197.15 3927.39,3197.15 4006.13,3197.15 4084.87,3197.15 4163.61,3197.15 4242.36,3197.15 4321.1,3197.15 4399.84,3197.15 4478.58,3197.15
  other v2: 3696.54,958.19 3493.44,960.47 3548.56,960.47 3603.68,960.47 3769.03,960.47 3824.15,960.47 3879.27,960.47 3934.38,960.47 3989.5,960.47 4044.62,960.47 4079.73,960.47 4154.86,960.47 4209.98,960.47 4265.09,960.47 4320.21,960.47 4375.33,960.47 4430.45,960.47 4485.57,960.47 4540.68,960.47 4595.8,960.47 4650.92,960.47 4706.04,975.99 3461.43,982.53 3438.32,1015.59 3982.26,1025.1 4061.86,1025.9 4706.04,1031.11 3436.04,1068.47 4706.04,1086.23 4062.65,1106.29 4706.04,1141.35 3438.2,1172.45 4062.65,1182.69 4706.04,1196.47 3439.15,1248.45 4706.04,1251.58 4706.04,1306.7 4615.16,1334.07 4554.22,1339.42 3438.32,1346.3 4521.62,1381.64 3438.32,1401.42 3438.44,1439.31 3437.47,1487.77 3436.83,1532.69 3438.32,1566.77 3438.32,1621.89 3438.32,1677.01 3438.32,1732.13 4565.28,1766.11 4607.84,1767.89 4648.63,1767.89 3438.32,1787.24 4706.04,1802.76 3438.32,1842.36 4706.04,1857.88 3438.32,1897.48 4706.04,1913 3438.32,1952.6 4706.04,1968.12 3438.32,2007.72 4706.04,2023.24 3438.32,2050.83 4706.04,2078.35 3445.04,2104.28 3493.44,2133.47 3548.56,2133.47 3603.68,2133.47 3658.79,2133.47 3713.91,2133.47 3769.03,2133.47 3824.15,2133.47 3879.27,2133.47 3934.38,2133.47 3989.5,2133.47 4044.62,2133.47 4099.74,2133.47 4154.86,2133.47 4209.98,2133.47 4265.09,2133.47 4320.21,2133.47 4375.33,2133.47 4485.57,2133.47 4540.68,2133.47 4595.8,2133.47 4650.92,2133.47 4706.04,2133.47 3499.08,2182.02 4706.04,2193.47 3499.08,2237.13 4706.04,2243.71 3499.08,2292.25 4706.04,2298.83 3499.08,2347.37 4706.04,2353.95 3499.57,2407.3 4706.04,2409.06 3499.08,2457.61 4706.04,2464.18 3139.65,2487.45 3411.48,2487.91 2132.12,2488.49 2187.24,2488.49 2242.36,2488.49 2297.47,2488.49 2352.59,2488.49 2407.71,2488.49 2462.83,2488.49 2517.95,2488.49 2573.06,2488.49 2628.18,2488.49 2683.3,2488.49 2738.42,2488.49 2793.54,2488.49 2848.65,2488.49 2903.77,2488.49 2949.15,2488.66 3014.01,2488.49 3069.13,2488.49 3179.36,2488.49 3234.48,2488.49 3271.91,2488.14 3371.02,2488.24 3454.95,2488.49 2084.99,2494.33 2050.66,2516.06 3499.08,2517.17 3001.72,2518.84 2125.98,2519.68 2204.72,2519.68 2283.46,2519.68 2362.2,2519.68 2440.94,2519.68 2519.68,2519.68 2598.43,2519.68 2677.17,2519.68 2755.91,2519.68 2834.65,2519.68 2913.39,2519.68 3070.87,2519.68 4706.04,2519.3 2023.71,2542.14 3499.08,2567.84 1996.77,2568.64 4706.04,2574.42 2131.45,2578.83 2046.2,2584.51 1978.38,2585.91 2910.87,2585.97 2440.94,2598.43 2519.68,2598.43 2598.43,2598.43 2677.17,2598.43 3000.1,2598.26 3070.87,2598.43 3149.61,2598.43 3228.35,2598.43 3385.83,2598.43 3499.08,2622.96 4706.04,2629.54 1931.15,2633.83 1898.99,2664.68 2517.35,2670.92 2595.57,2670.92 1968.5,2677.17 2047.24,2677.17 3149.61,2677.17 3228.35,2677.17 3307.09,2677.17 3385.83,2677.17 3499.08,2678.08 4706.04,2684.65 1866.33,2686.78 1607.4,2692.93 1656.07,2692.93 1699.96,2692.93 1746.9,2692.5 1785.57,2692.93 1821.64,2692.5 1573.07,2707.71 3499.08,2733.2 4706.04,2739.77 2283.46,2755.91 2362.2,2755.91 1567.85,2784.63 4706.04,2794.89 4643.95,2806.23 4601.15,2808.78 1567.85,2827.65 551.18,2834.65 629.92,2834.65 708.66,2834.65 787.4,2834.65 1417.32,2834.65 1496.06,2834.65 1811.02,2834.65 1889.76,2834.65 1968.5,2834.65 2047.24,2834.65 2283.46,2834.65 2362.2,2834.65 2440.94,2834.65 2598.43,2834.65 2677.17,2834.65 2913.39,2834.65 2992.13,2834.65 4526.26,2860.88 4529.51,2896.7 3499.58,2909.12 472.44,2913.39 551.18,2913.39 629.92,2913.39 708.66,2913.39 787.4,2913.39 2283.46,2913.39 2362.2,2913.39 3385.83,2913.39 1572.39,2944.14 3499.08,2953.67 1602.91,2964.9 1690.2,2965.51 1648.08,2966.73 1739.64,2966.12 1790.91,2966.12 1845.24,2973.44 393.7,2992.13 472.44,2992.13 551.18,2992.13 629.92,2992.13 708.66,2992.13 787.4,2992.13 1102.36,2992.13 1181.1,2992.13 1259.84,2992.13 1338.58,2992.13 1417.32,2992.13 1496.06,2992.13 1574.8,2992.13 1653.54,2992.13 1732.28,2992.13 1968.5,2992.13 2047.24,2992.13 2519.68,2992.13 2598.43,2992.13 3149.61,2992.13 3228.35,2992.13 3307.09,2992.13 3385.83,2992.13 1811.21,2998.77 1885.52,3000.3 3499.08,3008.79 1916.04,3031.43 3499.08,3063.9 1948.39,3064.39 78.74,3070.87 157.48,3070.87 236.22,3070.87 314.96,3070.87 393.7,3070.87 472.44,3070.87 551.18,3070.87 629.92,3070.87 708.66,3070.87 787.4,3070.87 866.14,3070.87 944.88,3070.87 1023.62,3070.87 1102.36,3070.87 1181.1,3070.87 1259.84,3070.87 1338.58,3070.87 1417.32,3070.87 1496.06,3070.87 1653.54,3070.87 1732.28,3070.87 1811.02,3070.87 1889.76,3070.87 2047.24,3070.87 2283.46,3070.87 2362.2,3070.87 2440.94,3070.87 2519.68,3070.87 2598.43,3070.87 2992.13,3070.87 3149.61,3070.87 3228.35,3070.87 3307.09,3070.87 3385.83,3070.87 1979.52,3094.91 3499.08,3119.02 2011.26,3126.65 78.74,3149.61 157.48,3149.61 236.22,3149.61 314.96,3149.61 393.7,3149.61 472.44,3149.61 551.18,3149.61 629.92,3149.61 708.66,3149.61 787.4,3149.61 866.14,3149.61 944.88,3149.61 1023.62,3149.61 1102.36,3149.61 1181.1,3149.61 1732.28,3149.61 1811.02,3149.61 1889.76,3149.61 1968.5,3149.61 2053.12,3156.35 2112.1,3164.29 2167.22,3164.29 2222.34,3164.29 2277.46,3164.29 2332.58,3164.29 2387.69,3164.29 2442.81,3164.29 2497.93,3164.29 2553.05,3164.29 2608.17,3164.29 2663.28,3164.29 2718.4,3164.29 2773.52,3164.29 2828.64,3164.29 2883.76,3164.29 2938.88,3164.29 2993.99,3164.29 3049.11,3164.29 3104.23,3164.29 3159.35,3164.29 3214.47,3164.29 3269.58,3164.29 3324.7,3164.29 3379.82,3164.29 3425.1,3164.29 3500,3175.98 1732.28,3228.35 1811.02,3228.35 1889.76,3228.35 1968.5,3228.35 2047.24,3228.35 2125.98,3228.35 2204.72,3228.35 2283.46,3228.35 2362.2,3228.35 2440.94,3228.35 2519.68,3228.35 2598.43,3228.35 2677.17,3228.35 2755.91,3228.35 2834.65,3228.35 2913.39,3228.35 2992.13,3228.35 3070.87,3228.35 3149.61,3228.35 3228.35,3228.35 3307.09,3228.35 3385.83,3228.35 3499.08,3229.26 4553.22,3243.98 4648.2,3246.94 4703.75,3254.31 3519.08,3284.38 3562.75,3302.29 3613.24,3302.29 3673.87,3302.29 3734.5,3302.29 3795.13,3302.29 3855.76,3302.29 3916.39,3302.29 3977.02,3302.29 4037.65,3302.29 4098.28,3302.29 4158.91,3302.29 4219.54,3302.29 4280.17,3302.29 4340.8,3302.29 4401.43,3302.29 4462.06,3302.29 4522.69,3302.29 4583.32,3302.29 4643.95,3302.29 4704.58,3302.29
  other v3: 914.39,324.28 953.76,324.28 914.39,353.8 953.76,353.8 914.39,521.13 953.76,521.13 914.39,550.65 953.76,550.65 1337.62,678.61 1337.62,717.98 1688.37,750.1
  other v5: 1973.8,750.1
MCU_DCMI_CLK: IC15.67 IC16.1 | length 269.1
  L1 w12.69: IC16.1@1430.14,1736.76 1430.14,1719.55 1432.65,1717.04 1449.86,1717.04 1450.41,1716.49 1578.26,1716.49 1599.12,1737.35 IC15.67@1672.11,1737.35
MCU_HSE: IC15.12 IC17.3 | length 782
  L1 w12.69: IC15.12@2281.4,1796.4 2519.04,1796.4 cw(c2519.04,1696.4) 2619.04,1696.4 2619.04,1568.29 ccw(c2719.04,1568.29) 2719.04,1468.29 IC17.3@2821.09,1468.29
MCU_VDDA: C108.2 C109.2 C110.2 C111.2 FB10.2 IC15.21 IC15.22 | length 222.1
  L1 w16: C108.2@2351.76,1986.09 C110.2@2451.76,1986.09 C111.2@2501.76,1986.09 2504.26,1988.59 2569.26,1988.59 FB10.2@2571.76,1991.09
MISC1: IC15.38 J3.2 | length 887.8
  L1 w10: v1(1974.69,2168.76) 1975.85,2167.61 1975.85,2121.64 IC15.38@1976.1,2121.39
  L6 w10: v1(1974.69,2168.76) 1974.69,2195.6 2038.41,2259.32 2681.88,2259.32 J3.2@2738.04,2315.47
MISC2: IC15.43 J3.4 | length 848.6
  L1 w10: IC15.43@1877.97,2121.09 1877.97,2171.44 1864.34,2185.07 1864.34,2272.6 1887.72,2295.98 2504.7,2295.98 2524.2,2315.47 J3.4@2538.04,2315.47
MIX_IF_N: C55.2 IC7.21 R12.1 | length 193
  L1 w12: C55.2@3742.76,2606.09 3840.14,2606.09 cw(c3840.14,2604.19) R12.1@3842.04,2604.19 cw(c3857.01,2604.19) 3857.01,2619.16 IC7.21@3926.14,2619.16
MIX_IF_P: C56.2 IC7.20 R13.1 | length 198.6
  L1 w12: C56.2@3741.6,2663.47 ccw(c3743.98,2663.47) 3743.98,2661.09 R13.1@3842.76,2661.09 ccw(c3865,2661.09) 3865,2638.84 IC7.20@3926.14,2638.84
MIX_LO_N: C61.2 IC7.4 | length 93
  L1 w12.69: IC7.4@4012.76,2532.54 4012.76,2478.8 ccw(c4037.76,2478.8) C61.2@4037.76,2453.8
MIX_LO_P: C59.2 IC7.3 | length 90.3
  L1 w12.69: C59.2@3972.76,2453.8 ccw(c3972.76,2474.12) 3993.07,2474.12 IC7.3@3993.07,2532.54
MIX_RF_N: C53.2 IC7.15 | length 73
  L1 w12.69: IC7.15@4012.76,2686.09 4012.76,2733.47 cw(c4029.04,2733.47) C53.2@4029.04,2749.76
MIX_RF_P: C54.2 IC7.16 | length 72.8
  L1 w12.69: C54.2@3977.04,2749.76 cw(c3977.04,2733.72) 3993.07,2733.72 IC7.16@3993.07,2686.09
NetAT1_2: AT1.2 FL1.1 | length 52.8
  L1 w12.69: AT1.2@3975.38,1550.34 4027.84,1550.34 FL1.1@4027.84,1550.72
NetAT2_1: AT2.1 P1.3 | length 184.4
  L1 w12.69: AT2.1@4492.04,1786.23 4492.04,1602.15 P1.3@4492.4,1602.15
NetAT2_2: AT2.2 C60.1 | length 694.7
  L1 w12.69: C60.1@4105.54,2295.12 4108.97,2296.09 4131.96,2296.09 cw(c4131.96,1936.01) 4492.04,1936.01 AT2.2@4492.04,1833.47
NetC1_1: C1.1 C4.1 C5.1 C7.2 C8.1 FB1.2 IC1.9 IC1.18 IC1.19 R1.2 | length 765
  L1 w8: C7.2@4268.64,1674.65 cw(c4277.24,1674.65) C7.2@4271.16,1680.73
  L1 w12: C1.1@4261.16,1421.17 4261.55,1421.56 4280.91,1421.56 v1(4281.3,1421.95) ; v1@4279,1421.17 C4.1@4301.16,1421.17 4302.14,1421.17 4305.98,1425.01 4305.98,1430.9 4307.12,1432.04 4307.12,1475.04 IC1.9@4308.01,1475.93
  L1 w15.75: C7.2@4268.64,1674.65 IC1.19@4268.64,1621.6 4278.48,1621.6 ; C7.2@4271.16,1680.73 cw(c4253.48,1663.05) 4278.48,1663.05 4278.48,1621.6 ; 4288.32,1667.85 IC1.18@4288.32,1621.6 4278.48,1621.6
  L1 w16: 4288.32,1667.85 cw(c4306.54,1667.85) 4293.66,1680.73
  L1 w20: FB1.2@4219.99,1796.09 4219.99,1725.29 4221.16,1724.12 R1.2@4221.16,1723.45 ; R1.2@4221.31,1722.62 4263.2,1680.73 4293.66,1680.73 C5.1@4316.16,1680.73 C8.1@4361.16,1680.73
  L4 w16: v3@4278.82,1653.67 4280.97,1651.52 4280.97,1422.28 v1(4281.3,1421.95)
  other v3: 4278.95,1654.49
NetC4_2: C4.2 R2.2 | length 40
  L1 w12: C4.2@4301.16,1385.73 R2.2@4341.16,1385.73
NetC6_2: C6.2 IC1.20 R1.1 | length 128.2
  L1 w12: R1.1@4185.72,1723.45 4189.57,1719.61 4189.57,1712.32 4220.17,1681.72 C6.2@4220.17,1680.73 4220.04,1680.6 4220.04,1659.37 4248.95,1630.46 IC1.20@4248.95,1621.6
NetC8_2: C8.2 R3.2 | length 45
  L1 w20: C8.2@4361.16,1716.17 R3.2@4406.16,1716.17
NetC9_1: C9.1 FL1.3 | length 43.8
  L1 w12.69: FL1.3@4075.23,1551.09 C9.1@4119.04,1551.09
NetC9_2: C9.2 IC1.3 | length 52.2
  L1 w12.69: C9.2@4154.47,1551.09 ccw(c4157.19,1551.09) 4157.19,1548.37 IC1.3@4205.1,1548.37
NetC10_1: C10.1 IC1.13 | length 45.5
  L1 w12.69: IC1.13@4361.16,1548.76 4405.48,1548.76 cw(c4405.48,1548) C10.1@4406.24,1548
NetC10_2: C10.2 P1.4 | length 51.8
  L1 w12.69: C10.2@4441.59,1548.45 4490.67,1548.45 ccw(c4490.67,1550.18) P1.4@4492.4,1550.18
NetC11_1: C11.1 IC1.10 IC15.33 R5.1 | length 3114.3
  L1 w12: IC15.33@2075.18,2120.73 2075.27,2120.83 2075.27,2189.88 v1(2075.9,2190.51) ; v1(3278.57,1527.03) 3317.94,1527.03 v1(3380.93,1464.04) ; v1(4329.75,1448.29) cw(c4329.75,1450.35) 4327.69,1450.35 IC1.10@4327.69,1475.93 4355.2,1475.93 4376.33,1454.8 4376.33,1425.01 4380.17,1421.17 C11.1@4421.16,1421.17
  L6 w12: v1(2075.9,2190.51) 2457.61,2190.51 2522.66,2125.46 2522.66,1578.21 2573.84,1527.03 v1(3278.57,1527.03) ; v1(3380.93,1464.04) 4312.45,1464.04 4328.2,1448.29 v1(4329.75,1448.29)
NetC12_1: C12.1 IC4.5 | length 58.3
  L1 w12.69: IC4.5@3769.89,1392.3 C12.1@3769.89,1450.61
NetC12_2: C12.2 IC2.4 | length 79.9
  L1 w12.69: C12.2@3771.19,1485.69 3771.47,1485.97 3771.47,1565.1 IC2.4@3771.76,1565.38
NetC13_1: C13.1 IC4.4 | length 77.4
  L1 w12: IC4.4@3789.58,1392.3 3789.67,1392.4 3789.67,1420.9 3823.48,1454.7 C13.1@3823.48,1455.69